# Altium PCB Copy of pwr_V1.1.PcbDoc (part 2 of 2)
Units mil, origin at the board's own origin, x right, y up, seen from the top; angles counter-clockwise.
Board outline 5925.54 x 5925.54 mil, 4 copper layers (Top Layer, GND, VCC, Bottom Layer); 133 components, 126 nets, 409 pads, 2275 vias.
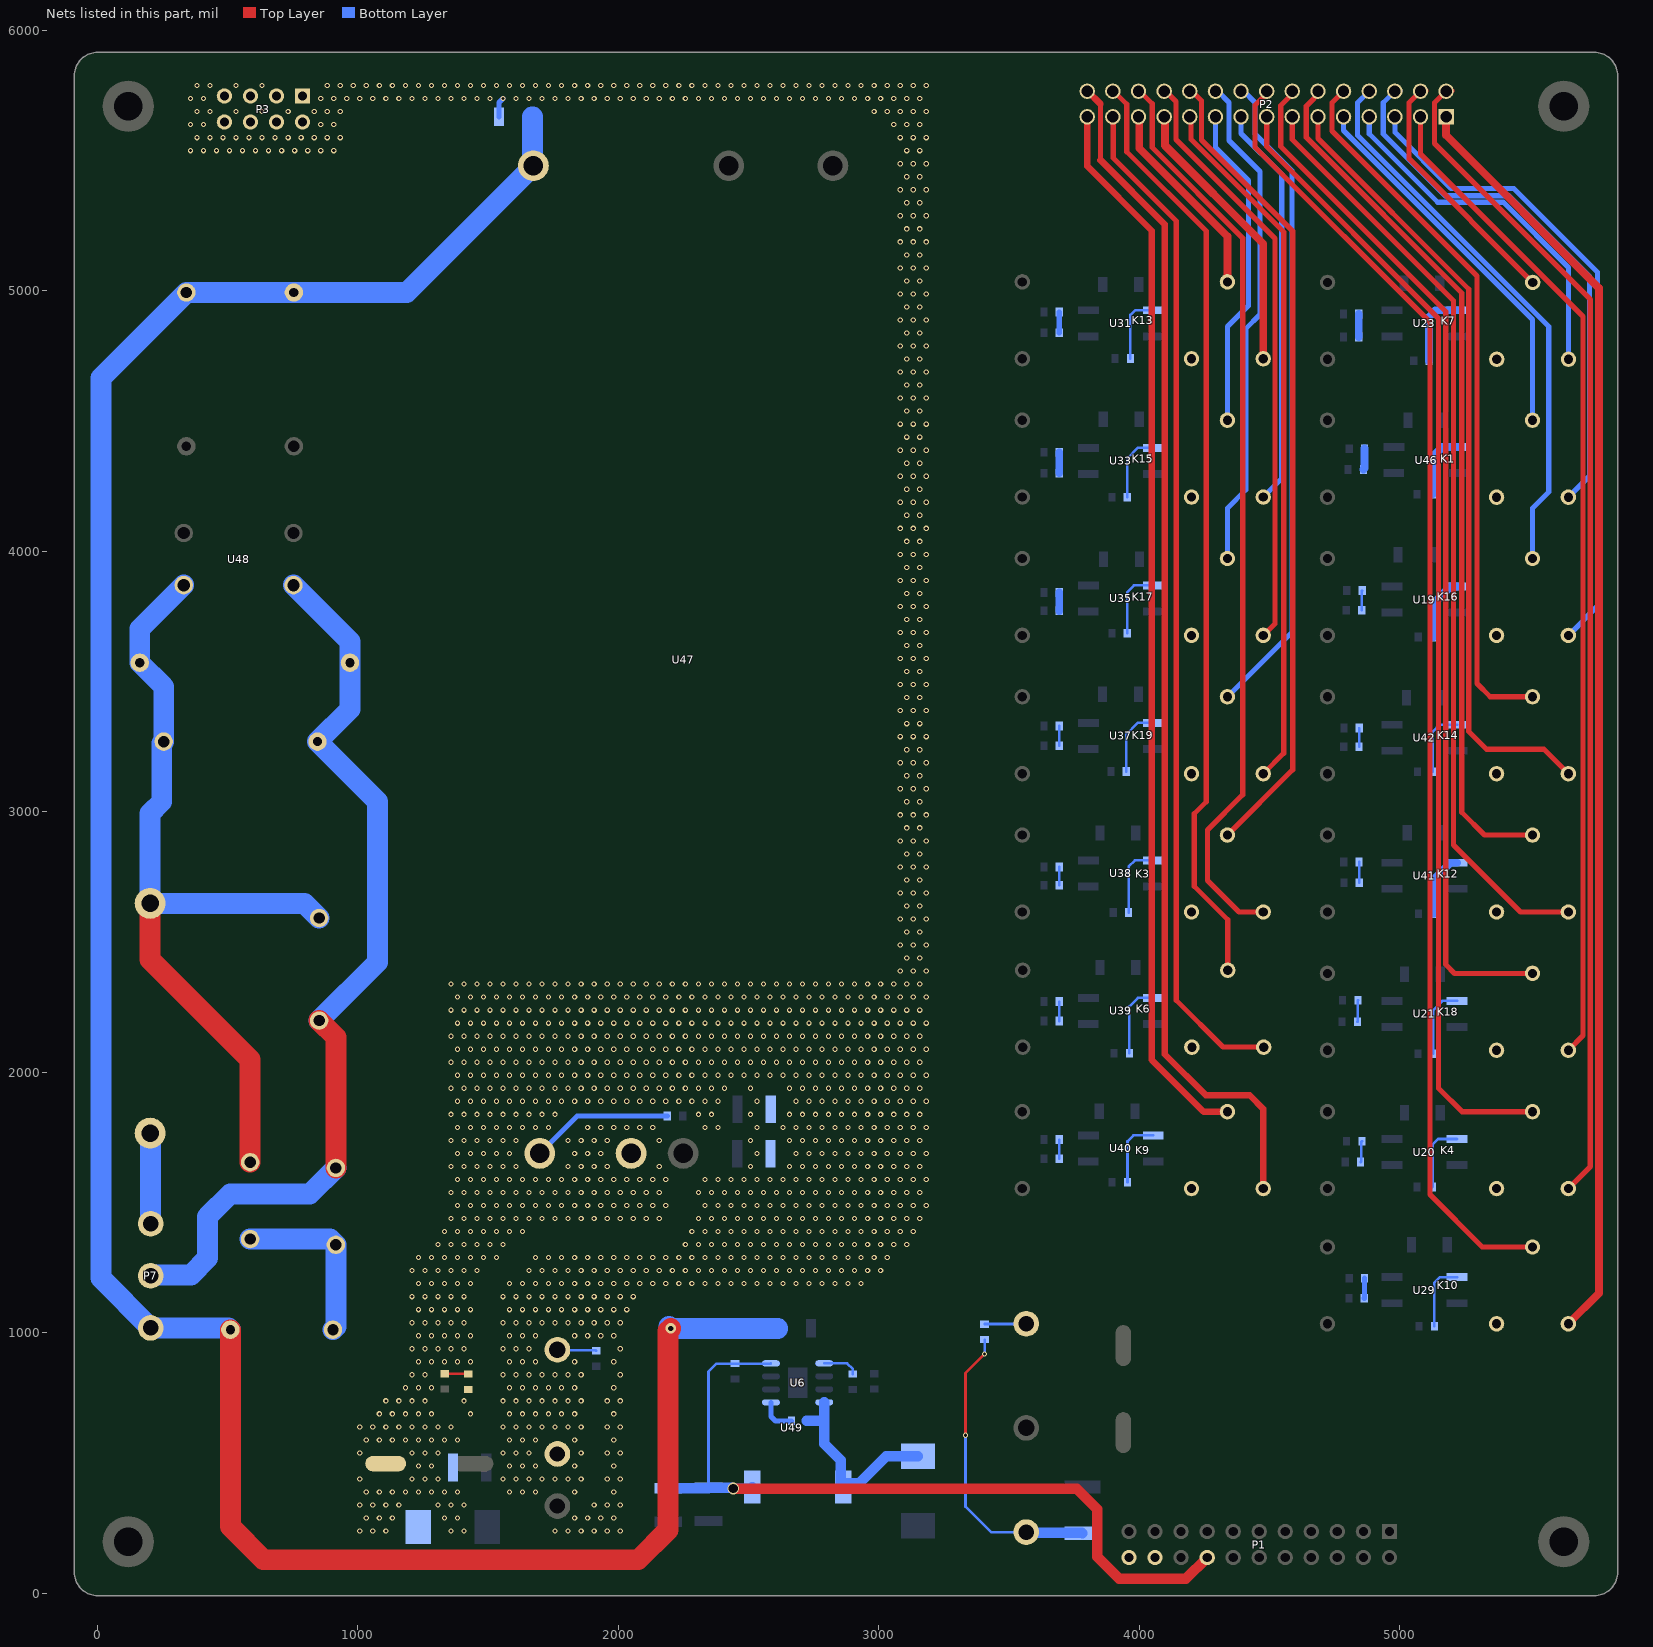
[diagram p2: the nets of this part, all layers, seen from the top]

## Via types
v1: diameter 20, hole 12, Top Layer to Bottom Layer, tented both sides, 2255 vias
v2: diameter 40, hole 20, Top Layer to Bottom Layer, tented both sides, 17 vias
v3: diameter 45, hole 35, Top Layer to Bottom Layer, tented both sides, 1 vias
v4: diameter 45, hole 30, Top Layer to Bottom Layer, tented both sides, 1 vias
v5: diameter 59.06, hole 39.37, Top Layer to Bottom Layer, 1 vias

## Nets (pads, with @x,y where several pads share a name; then routed paths per layer and width w, separated by ;. In a path a pad name is that pad's centre, name@x,y a point inside that pad or via, vN(x,y) a via of type N, cw(c..) or ccw(c..) an arc to the next point about the centre after c; other vN are vias at no path point) (continued)
GND: C44.2 C132.1 C134.1 C135.1 C136.1 D26.1 LED17.2 P1.20 P1.22 P3.1 P3.2 P3.3 P3.4 P3.5 P3.6 P3.7 P3.8 U47.5 U49.2 | length 76.3
  Bottom Layer w20: C132.1@1542.05,5668 1542.05,5722.89 v1(1557.16,5738)
  other v1: 1007.16,238 1057.16,238 1107.16,238 1357.16,238 1407.16,238 1757.16,238 1807.16,238 1857.16,238 1907.16,238 1957.16,238 2007.16,238 1032.16,288 1082.16,288 1132.16,288 1332.16,288 1382.16,288 1832.16,288 1882.16,288 1932.16,288 1982.16,288 1007.16,338 1057.16,338 1107.16,338 1157.16,338 1307.16,338 1357.16,338 1407.16,338 1907.16,338 1957.16,338 2007.16,338 1032.16,388 1082.16,388 1132.16,388 1182.16,388 1232.16,388 1282.16,388 1332.16,388 1382.16,388 1582.16,388 1632.16,388 1682.16,388 1832.16,388 1982.16,388 1007.16,438 1207.16,438 1257.16,438 1307.16,438 1557.16,438 1607.16,438 1657.16,438 1707.16,438 1757.16,438 1807.16,438 1857.16,438 1957.16,438 2007.16,438 1232.16,488 1282.16,488 1582.16,488 1632.16,488 1682.16,488 1832.16,488 1982.16,488 1007.16,538 1207.16,538 1257.16,538 1307.16,538 1557.16,538 1607.16,538 1657.16,538 1857.16,538 1957.16,538 2007.16,538 1032.16,588 1082.16,588 1132.16,588 1182.16,588 1232.16,588 1282.16,588 1332.16,588 1382.16,588 1582.16,588 1632.16,588 1682.16,588 1832.16,588 1982.16,588 1007.16,638 1057.16,638 1107.16,638 1157.16,638 1207.16,638 1257.16,638 1307.16,638 1357.16,638 1557.16,638 1607.16,638 1657.16,638 1707.16,638 1757.16,638 1807.16,638 1857.16,638 1957.16,638 2007.16,638 1082.16,688 1132.16,688 1182.16,688 1232.16,688 1282.16,688 1432.16,688 1582.16,688 1632.16,688 1682.16,688 1732.16,688 1782.16,688 1832.16,688 1982.16,688 1107.16,738 1157.16,738 1207.16,738 1257.16,738 1407.16,738 1557.16,738 1607.16,738 1657.16,738 1707.16,738 1757.16,738 1807.16,738 1857.16,738 1957.16,738 2007.16,738 1182.16,788 1232.16,788 1282.16,788 1582.16,788 1632.16,788 1682.16,788 1732.16,788 1782.16,788 1832.16,788 1982.16,788 1207.16,838 1257.16,838 1557.16,838 1607.16,838 1657.16,838 1707.16,838 1757.16,838 1807.16,838 1857.16,838 2007.16,838 1232.16,888 1282.16,888 1332.16,888 1382.16,888 1432.16,888 1582.16,888 1632.16,888 1682.16,888 1832.16,888 1982.16,888 1207.16,938 1257.16,938 1307.16,938 1357.16,938 1407.16,938 1557.16,938 1607.16,938 1657.16,938 2007.16,938 1232.16,988 1282.16,988 1332.16,988 1382.16,988 1432.16,988 1582.16,988 1632.16,988 1682.16,988 1832.16,988 1882.16,988 1932.16,988 1982.16,988 1207.16,1038 1257.16,1038 1307.16,1038 1357.16,1038 1407.16,1038 1557.16,1038 1607.16,1038 1657.16,1038 1707.16,1038 1757.16,1038 1807.16,1038 1857.16,1038 1907.16,1038 1957.16,1038 2007.16,1038 1232.16,1088 1282.16,1088 1332.16,1088 1382.16,1088 1432.16,1088 1582.16,1088 1632.16,1088 1682.16,1088 1732.16,1088 1782.16,1088 1832.16,1088 1882.16,1088 1932.16,1088 1982.16,1088 2032.16,1088 1207.16,1138 1257.16,1138 1307.16,1138 1357.16,1138 1407.16,1138 1557.16,1138 1607.16,1138 1657.16,1138 1707.16,1138 1757.16,1138 1807.16,1138 1857.16,1138 1907.16,1138 1957.16,1138 2007.16,1138 2057.16,1138 1232.16,1188 1282.16,1188 1332.16,1188 1382.16,1188 1432.16,1188 1582.16,1188 1632.16,1188 1682.16,1188 1732.16,1188 1782.16,1188 1832.16,1188 1882.16,1188 1932.16,1188 1982.16,1188 2032.16,1188 2082.16,1188 2132.16,1188 2182.16,1188 2232.16,1188 2282.16,1188 2332.16,1188 2382.16,1188 2432.16,1188 2482.16,1188 2532.16,1188 2582.16,1188 2632.16,1188 2682.16,1188 2732.16,1188 2782.16,1188 2832.16,1188 2882.16,1188 2932.16,1188 1207.16,1238 1257.16,1238 1307.16,1238 1357.16,1238 1407.16,1238 1457.16,1238 1657.16,1238 1707.16,1238 1757.16,1238 1807.16,1238 1857.16,1238 1907.16,1238 1957.16,1238 2007.16,1238 2057.16,1238 2107.16,1238 2157.16,1238 2207.16,1238 2257.16,1238 2307.16,1238 2357.16,1238 2407.16,1238 2457.16,1238 2507.16,1238 2557.16,1238 2607.16,1238 2657.16,1238 2707.16,1238 2757.16,1238 2807.16,1238 2857.16,1238 2907.16,1238 2957.16,1238 3007.16,1238 1232.16,1288 1282.16,1288 1332.16,1288 1382.16,1288 1432.16,1288 1482.16,1288 1532.16,1288 1682.16,1288 1732.16,1288 1782.16,1288 1832.16,1288 1882.16,1288 1932.16,1288 1982.16,1288 2032.16,1288 2082.16,1288 2132.16,1288 2182.16,1288 2232.16,1288 2282.16,1288 2332.16,1288 2382.16,1288 2432.16,1288 2482.16,1288 2532.16,1288 2582.16,1288 2632.16,1288 2682.16,1288 2732.16,1288 2782.16,1288 2832.16,1288 2882.16,1288 2932.16,1288 2982.16,1288 3032.16,1288 1307.16,1338 1357.16,1338 1407.16,1338 1457.16,1338 1507.16,1338 1557.16,1338 2257.16,1338 2307.16,1338 2357.16,1338 2407.16,1338 2457.16,1338 2507.16,1338 2557.16,1338 2607.16,1338 2657.16,1338 2707.16,1338 2757.16,1338 2807.16,1338 2857.16,1338 2907.16,1338 2957.16,1338 3007.16,1338 3057.16,1338 3107.16,1338 1332.16,1388 1382.16,1388 1432.16,1388 1482.16,1388 1532.16,1388 1582.16,1388 1632.16,1388 2282.16,1388 2332.16,1388 2382.16,1388 2432.16,1388 2482.16,1388 2532.16,1388 2582.16,1388 2632.16,1388 2682.16,1388 2732.16,1388 2782.16,1388 2832.16,1388 2882.16,1388 2932.16,1388 2982.16,1388 3032.16,1388 3082.16,1388 3132.16,1388 1357.16,1438 1407.16,1438 1457.16,1438 1507.16,1438 1557.16,1438 1607.16,1438 1657.16,1438 1707.16,1438 1757.16,1438 1807.16,1438 1857.16,1438 1907.16,1438 1957.16,1438 2007.16,1438 2057.16,1438 2107.16,1438 2157.16,1438 2307.16,1438 2357.16,1438 2407.16,1438 2457.16,1438 2507.16,1438 2557.16,1438 2607.16,1438 2657.16,1438 2707.16,1438 2757.16,1438 2807.16,1438 2857.16,1438 2907.16,1438 2957.16,1438 3007.16,1438 3057.16,1438 3107.16,1438 3157.16,1438 1382.16,1488 1432.16,1488 1482.16,1488 1532.16,1488 1582.16,1488 1632.16,1488 1682.16,1488 1732.16,1488 1782.16,1488 1832.16,1488 1882.16,1488 1932.16,1488 1982.16,1488 2032.16,1488 2082.16,1488 2132.16,1488 2182.16,1488 2332.16,1488 2382.16,1488 2432.16,1488 2482.16,1488 2532.16,1488 2582.16,1488 2632.16,1488 2682.16,1488 2732.16,1488 2782.16,1488 2832.16,1488 2882.16,1488 2932.16,1488 2982.16,1488 3032.16,1488 3082.16,1488 3132.16,1488 3182.16,1488 1357.16,1538 1407.16,1538 1457.16,1538 1507.16,1538 1557.16,1538 1607.16,1538 1657.16,1538 1707.16,1538 1757.16,1538 1807.16,1538 1857.16,1538 1907.16,1538 1957.16,1538 2007.16,1538 2057.16,1538 2107.16,1538 2157.16,1538 2307.16,1538 2357.16,1538 2407.16,1538 2457.16,1538 2507.16,1538 2557.16,1538 2607.16,1538 2657.16,1538 2707.16,1538 2757.16,1538 2807.16,1538 2857.16,1538 2907.16,1538 2957.16,1538 3007.16,1538 3057.16,1538 3107.16,1538 3157.16,1538 1382.16,1588 1432.16,1588 1482.16,1588 1532.16,1588 1582.16,1588 1632.16,1588 1682.16,1588 1732.16,1588 1782.16,1588 1832.16,1588 1882.16,1588 1932.16,1588 1982.16,1588 2032.16,1588 2082.16,1588 2132.16,1588 2182.16,1588 2332.16,1588 2382.16,1588 2432.16,1588 2482.16,1588 2532.16,1588 2582.16,1588 2632.16,1588 2682.16,1588 2732.16,1588 2782.16,1588 2832.16,1588 2882.16,1588 2932.16,1588 2982.16,1588 3032.16,1588 3082.16,1588 3132.16,1588 3182.16,1588 1357.16,1638 1407.16,1638 1457.16,1638 1507.16,1638 1557.16,1638 1607.16,1638 1807.16,1638 1857.16,1638 1907.16,1638 1957.16,1638 2157.16,1638 2507.16,1638 2657.16,1638 2707.16,1638 2757.16,1638 2807.16,1638 2857.16,1638 2907.16,1638 2957.16,1638 3007.16,1638 3057.16,1638 3107.16,1638 3157.16,1638 1382.16,1688 1432.16,1688 1482.16,1688 1532.16,1688 1582.16,1688 1832.16,1688 1882.16,1688 1932.16,1688 2532.16,1688 2682.16,1688 2732.16,1688 2782.16,1688 2832.16,1688 2882.16,1688 2932.16,1688 2982.16,1688 3032.16,1688 3082.16,1688 3132.16,1688 3182.16,1688 1357.16,1738 1407.16,1738 1457.16,1738 1507.16,1738 1557.16,1738 1607.16,1738 1807.16,1738 1857.16,1738 1907.16,1738 1957.16,1738 2157.16,1738 2507.16,1738 2657.16,1738 2707.16,1738 2757.16,1738 2807.16,1738 2857.16,1738 2907.16,1738 2957.16,1738 3007.16,1738 3057.16,1738 3107.16,1738 3157.16,1738 1382.16,1788 1432.16,1788 1482.16,1788 1532.16,1788 1582.16,1788 1632.16,1788 1682.16,1788 1732.16,1788 1882.16,1788 1932.16,1788 1982.16,1788 2032.16,1788 2082.16,1788 2132.16,1788 2332.16,1788 2382.16,1788 2532.16,1788 2632.16,1788 2682.16,1788 2732.16,1788 2782.16,1788 2832.16,1788 2882.16,1788 2932.16,1788 2982.16,1788 3032.16,1788 3082.16,1788 3132.16,1788 3182.16,1788 1357.16,1838 1407.16,1838 1457.16,1838 1507.16,1838 1557.16,1838 1607.16,1838 1657.16,1838 1707.16,1838 1757.16,1838 2307.16,1838 2357.16,1838 2507.16,1838 2657.16,1838 2707.16,1838 2757.16,1838 2807.16,1838 2857.16,1838 2907.16,1838 2957.16,1838 3007.16,1838 3057.16,1838 3107.16,1838 3157.16,1838 1382.16,1888 1432.16,1888 1482.16,1888 1532.16,1888 1582.16,1888 1632.16,1888 1682.16,1888 1732.16,1888 1782.16,1888 1832.16,1888 1882.16,1888 1932.16,1888 1982.16,1888 2032.16,1888 2082.16,1888 2132.16,1888 2182.16,1888 2232.16,1888 2282.16,1888 2332.16,1888 2382.16,1888 2532.16,1888 2682.16,1888 2732.16,1888 2782.16,1888 2832.16,1888 2882.16,1888 2932.16,1888 2982.16,1888 3032.16,1888 3082.16,1888 3132.16,1888 3182.16,1888 1357.16,1938 1407.16,1938 1457.16,1938 1507.16,1938 1557.16,1938 1607.16,1938 1657.16,1938 1707.16,1938 1757.16,1938 1807.16,1938 1857.16,1938 1907.16,1938 1957.16,1938 2007.16,1938 2057.16,1938 2107.16,1938 2157.16,1938 2207.16,1938 2257.16,1938 2307.16,1938 2357.16,1938 2407.16,1938 2507.16,1938 2657.16,1938 2707.16,1938 2757.16,1938 2807.16,1938 2857.16,1938 2907.16,1938 2957.16,1938 3007.16,1938 3057.16,1938 3107.16,1938 3157.16,1938 1382.16,1988 1432.16,1988 1482.16,1988 1532.16,1988 1582.16,1988 1632.16,1988 1682.16,1988 1732.16,1988 1782.16,1988 1832.16,1988 1882.16,1988 1932.16,1988 1982.16,1988 2032.16,1988 2082.16,1988 2132.16,1988 2182.16,1988 2232.16,1988 2282.16,1988 2332.16,1988 2382.16,1988 2432.16,1988 2482.16,1988 2532.16,1988 2582.16,1988 2632.16,1988 2682.16,1988 2732.16,1988 2782.16,1988 2832.16,1988 2882.16,1988 2932.16,1988 2982.16,1988 3032.16,1988 3082.16,1988 3132.16,1988 3182.16,1988 1357.16,2038 1407.16,2038 1457.16,2038 1507.16,2038 1557.16,2038 1607.16,2038 1657.16,2038 1707.16,2038 1757.16,2038 1807.16,2038 1857.16,2038 1907.16,2038 1957.16,2038 2007.16,2038 2057.16,2038 2107.16,2038 2157.16,2038 2207.16,2038 2257.16,2038 2307.16,2038 2357.16,2038 2407.16,2038 2457.16,2038 2507.16,2038 2557.16,2038 2607.16,2038 2657.16,2038 2707.16,2038 2757.16,2038 2807.16,2038 2857.16,2038 2907.16,2038 2957.16,2038 3007.16,2038 3057.16,2038 3107.16,2038 3157.16,2038 1382.16,2088 1432.16,2088 1482.16,2088 1532.16,2088 1582.16,2088 1632.16,2088 1682.16,2088 1732.16,2088 1782.16,2088 1832.16,2088 1882.16,2088 1932.16,2088 1982.16,2088 2032.16,2088 2082.16,2088 2132.16,2088 2182.16,2088 2232.16,2088 2282.16,2088 2332.16,2088 2382.16,2088 2432.16,2088 2482.16,2088 2532.16,2088 2582.16,2088 2632.16,2088 2682.16,2088 2732.16,2088 2782.16,2088 2832.16,2088 2882.16,2088 2932.16,2088 2982.16,2088 3032.16,2088 3082.16,2088 3132.16,2088 3182.16,2088 1357.16,2138 1407.16,2138 1457.16,2138 1507.16,2138 1557.16,2138 1607.16,2138 1657.16,2138 1707.16,2138 1757.16,2138 1807.16,2138 1857.16,2138 1907.16,2138 1957.16,2138 2007.16,2138 2057.16,2138 2107.16,2138 2157.16,2138 2207.16,2138 2257.16,2138 2307.16,2138 2357.16,2138 2407.16,2138 2457.16,2138 2507.16,2138 2557.16,2138 2607.16,2138 2657.16,2138 2707.16,2138 2757.16,2138 2807.16,2138 2857.16,2138 2907.16,2138 2957.16,2138 3007.16,2138 3057.16,2138 3107.16,2138 3157.16,2138 1382.16,2188 1432.16,2188 1482.16,2188 1532.16,2188 1582.16,2188 1632.16,2188 1682.16,2188 1732.16,2188 1782.16,2188 1832.16,2188 1882.16,2188 1932.16,2188 1982.16,2188 2032.16,2188 2082.16,2188 2132.16,2188 2182.16,2188 2232.16,2188 2282.16,2188 2332.16,2188 2382.16,2188 2432.16,2188 2482.16,2188 2532.16,2188 2582.16,2188 2632.16,2188 2682.16,2188 2732.16,2188 2782.16,2188 2832.16,2188 2882.16,2188 2932.16,2188 2982.16,2188 3032.16,2188 3082.16,2188 3132.16,2188 3182.16,2188 1357.16,2238 1407.16,2238 1457.16,2238 1507.16,2238 1557.16,2238 1607.16,2238 1657.16,2238 1707.16,2238 1757.16,2238 1807.16,2238 1857.16,2238 1907.16,2238 1957.16,2238 2007.16,2238 2057.16,2238 2107.16,2238 2157.16,2238 2207.16,2238 2257.16,2238 2307.16,2238 2357.16,2238 2407.16,2238 2457.16,2238 2507.16,2238 2557.16,2238 2607.16,2238 2657.16,2238 2707.16,2238 2757.16,2238 2807.16,2238 2857.16,2238 2907.16,2238 2957.16,2238 3007.16,2238 3057.16,2238 3107.16,2238 3157.16,2238 1382.16,2288 1432.16,2288 1482.16,2288 1532.16,2288 1582.16,2288 1632.16,2288 1682.16,2288 1732.16,2288 1782.16,2288 1832.16,2288 1882.16,2288 1932.16,2288 1982.16,2288 2032.16,2288 2082.16,2288 2132.16,2288 2182.16,2288 2232.16,2288 2282.16,2288 2332.16,2288 2382.16,2288 2432.16,2288 2482.16,2288 2532.16,2288 2582.16,2288 2632.16,2288 2682.16,2288 2732.16,2288 2782.16,2288 2832.16,2288 2882.16,2288 2932.16,2288 2982.16,2288 3032.16,2288 3082.16,2288 3132.16,2288 3182.16,2288 1357.16,2338 1407.16,2338 1457.16,2338 1507.16,2338 1557.16,2338 1607.16,2338 1657.16,2338 1707.16,2338 1757.16,2338 1807.16,2338 1857.16,2338 1907.16,2338 1957.16,2338 2007.16,2338 2057.16,2338 2107.16,2338 2157.16,2338 2207.16,2338 2257.16,2338 2307.16,2338 2357.16,2338 2407.16,2338 2457.16,2338 2507.16,2338 2557.16,2338 2607.16,2338 2657.16,2338 2707.16,2338 2757.16,2338 2807.16,2338 2857.16,2338 2907.16,2338 2957.16,2338 3007.16,2338 3057.16,2338 3107.16,2338 3157.16,2338 3082.16,2388 3132.16,2388 3182.16,2388 3107.16,2438 3157.16,2438 3082.16,2488 3132.16,2488 3182.16,2488 3107.16,2538 3157.16,2538 3082.16,2588 3132.16,2588 3182.16,2588 3107.16,2638 3157.16,2638 3082.16,2688 3132.16,2688 3182.16,2688 3107.16,2738 3157.16,2738 3082.16,2788 3132.16,2788 3182.16,2788 3107.16,2838 3157.16,2838 3082.16,2888 3132.16,2888 3182.16,2888 3107.16,2938 3157.16,2938 3082.16,2988 3132.16,2988 3182.16,2988 3107.16,3038 3157.16,3038 3082.16,3088 3132.16,3088 3182.16,3088 3107.16,3138 3157.16,3138 3082.16,3188 3132.16,3188 3182.16,3188 3107.16,3238 3157.16,3238 3082.16,3288 3132.16,3288 3182.16,3288 3107.16,3338 3157.16,3338 3082.16,3388 3132.16,3388 3182.16,3388 3107.16,3438 3157.16,3438 3082.16,3488 3132.16,3488 3182.16,3488 3107.16,3538 3157.16,3538 3082.16,3588 3132.16,3588 3182.16,3588 3107.16,3638 3157.16,3638 3082.16,3688 3132.16,3688 3182.16,3688 3107.16,3738 3157.16,3738 3082.16,3788 3132.16,3788 3182.16,3788 3107.16,3838 3157.16,3838 3082.16,3888 3132.16,3888 3182.16,3888 3107.16,3938 3157.16,3938 3082.16,3988 3132.16,3988 3182.16,3988 3107.16,4038 3157.16,4038 3082.16,4088 3132.16,4088 3182.16,4088 3107.16,4138 3157.16,4138 3082.16,4188 3132.16,4188 3182.16,4188 3107.16,4238 3157.16,4238 3082.16,4288 3132.16,4288 3182.16,4288 3107.16,4338 3157.16,4338 3082.16,4388 3132.16,4388 3182.16,4388 3107.16,4438 3157.16,4438 3082.16,4488 3132.16,4488 3182.16,4488 3107.16,4538 3157.16,4538 3082.16,4588 3132.16,4588 3182.16,4588 3107.16,4638 3157.16,4638 3082.16,4688 3132.16,4688 3182.16,4688 3107.16,4738 3157.16,4738 3082.16,4788 3132.16,4788 3182.16,4788 3107.16,4838 3157.16,4838 3082.16,4888 3132.16,4888 3182.16,4888 3107.16,4938 3157.16,4938 3082.16,4988 3132.16,4988 3182.16,4988 3107.16,5038 3157.16,5038 3082.16,5088 3132.16,5088 3182.16,5088 3107.16,5138 3157.16,5138 3082.16,5188 3132.16,5188 3182.16,5188 3107.16,5238 3157.16,5238 3082.16,5288 3132.16,5288 3182.16,5288 3107.16,5338 3157.16,5338 3082.16,5388 3132.16,5388 3182.16,5388 3107.16,5438 3157.16,5438 3082.16,5488 3132.16,5488 3182.16,5488 357.16,5538 407.16,5538 457.16,5538 507.16,5538 557.16,5538 607.16,5538 657.16,5538 707.16,5538 757.16,5538 807.16,5538 857.16,5538 907.16,5538 3107.16,5538 3157.16,5538 382.16,5588 432.16,5588 482.16,5588 532.16,5588 582.16,5588 632.16,5588 682.16,5588 732.16,5588 782.16,5588 832.16,5588 882.16,5588 932.16,5588 3082.16,5588 3132.16,5588 3182.16,5588 357.16,5638 407.16,5638 857.16,5638 907.16,5638 3057.16,5638 3107.16,5638 3157.16,5638 382.16,5688 432.16,5688 532.16,5688 632.16,5688 732.16,5688 832.16,5688 882.16,5688 932.16,5688 2982.16,5688 3032.16,5688 3082.16,5688 3132.16,5688 3182.16,5688 357.16,5738 407.16,5738 857.16,5738 907.16,5738 957.16,5738 1007.16,5738 1057.16,5738 1107.16,5738 1157.16,5738 1207.16,5738 1257.16,5738 1307.16,5738 1357.16,5738 1407.16,5738 1457.16,5738 1507.16,5738 1607.16,5738 1657.16,5738 1707.16,5738 1757.16,5738 1807.16,5738 1857.16,5738 1907.16,5738 1957.16,5738 2007.16,5738 2057.16,5738 2107.16,5738 2157.16,5738 2207.16,5738 2257.16,5738 2307.16,5738 2357.16,5738 2407.16,5738 2457.16,5738 2507.16,5738 2557.16,5738 2607.16,5738 2657.16,5738 2707.16,5738 2757.16,5738 2807.16,5738 2857.16,5738 2907.16,5738 2957.16,5738 3007.16,5738 3057.16,5738 3107.16,5738 3157.16,5738 382.16,5788 432.16,5788 532.16,5788 632.16,5788 882.16,5788 932.16,5788 982.16,5788 1032.16,5788 1082.16,5788 1132.16,5788 1182.16,5788 1232.16,5788 1282.16,5788 1332.16,5788 1382.16,5788 1432.16,5788 1482.16,5788 1532.16,5788 1582.16,5788 1632.16,5788 1682.16,5788 1732.16,5788 1782.16,5788 1832.16,5788 1882.16,5788 1932.16,5788 1982.16,5788 2032.16,5788 2082.16,5788 2132.16,5788 2182.16,5788 2232.16,5788 2282.16,5788 2332.16,5788 2382.16,5788 2432.16,5788 2482.16,5788 2532.16,5788 2582.16,5788 2632.16,5788 2682.16,5788 2732.16,5788 2782.16,5788 2832.16,5788 2882.16,5788 2932.16,5788 2982.16,5788 3032.16,5788 3082.16,5788 3132.16,5788 3182.16,5788
NetC62_2: C62.2 C129.1 C131.2 C132.2 P7.3 R177.1 U47.3 | length 9958.1
  Top Layer w80: R177.1@510.26,1011 510.26,255.74 638,128 2076.5,128 2191,242.5 2191,1006 v2(2201,1016)
  Bottom Layer w80: R177.1@510.26,1011 503.26,1018 P7.3@204.26,1018 13,1209.26 13,4665.29 C131.2@341.26,4993.55 C129.1@754,4993.55 1187.28,4993.55 U47.3@1673.85,5480.13 1670,5483.98 C132.2@1670,5668 ; v2@2194,1023 v2(2201,1016) C62.2@2612,1016
NetC87_2: C87.2 R123.1 | length 76.8
  Bottom Layer w10: R123.1@4854,3773 4855,3774 4855,3848 C87.2@4856,3849
NetC88_2: C88.2 R125.1 | length 82.1
  Bottom Layer w10: R125.1@4850,1655 4852.53,1657.53 4852.53,1732.47 C88.2@4855.06,1735
NetC89_2: C89.2 R126.1 | length 83.8
  Bottom Layer w10: R126.1@4838,2193 4839,2194 4839,2275 C89.2@4840,2276
NetC90_2: C90.2 R122.1 | length 81.7
  Bottom Layer w30: R122.1@4861.06,4314 4861.06,4314.51 4865.06,4318.51 C90.2@4865.06,4394
NetC91_2: C91.2 R129.1 | length 88
  Bottom Layer w30: R129.1@4843.06,4823 C91.2@4843.03,4910.97
NetC93_2: C93.2 R133.1 | length 77.4
  Bottom Layer w20: R133.1@4864.06,1131.82 4864.53,1132.29 4864.53,1208.35 C93.2@4865,1208.82
NetC95_2: C95.2 R137.1 | length 80
  Bottom Layer w20: R137.1@3693,4839 C95.2@3693,4919
NetC98_2: C98.2 R141.1 | length 80
  Bottom Layer w30: R141.1@3693,4300 C98.2@3693,4380
NetC102_2: C102.2 R145.1 | length 71
  Bottom Layer w30: R145.1@3693,3771 C102.2@3693,3842
NetC104_2: C104.2 R149.1 | length 76
  Bottom Layer w10: R149.1@3693,3253 C104.2@3693,3329
NetC106_2: C106.2 R151.1 | length 70
  Bottom Layer w10: R151.1@3693,2718 C106.2@3693,2788
NetC107_2: C107.2 R153.1 | length 75
  Bottom Layer w10: R153.1@3693,2196 C107.2@3693,2271
NetC109_2: C109.2 R155.1 | length 73
  Bottom Layer w10: R155.1@3693,1668 C109.2@3693,1741
NetC110_2: C110.2 R157.1 | length 80.4
  Bottom Layer w10: C110.2@4844,2807 4844.5,2806.5 4844.5,2727.5 R157.1@4845,2727
NetC111_2: C111.2 R159.1 | length 72.4
  Bottom Layer w10: R159.1@4844,3249 4844.5,3249.5 4844.5,3320.5 C111.2@4845,3321
NetC130_1: C130.1 P7.2 R174.2 R175.1 R176.1 U48.1 | length 3569.6
  Top Layer w80: R175.1@851,2198 915.26,2133.74 R176.1@915.26,1632.28
  Bottom Layer w80: P7.2@204.26,1218 207.79,1221.53 358.53,1221.53 423,1286 423,1445 510,1532 814.98,1532 R176.1@915.26,1632.28 ; U48.1@752.52,3870 969.35,3653.17 R174.2@969.35,3572 969.35,3393.54 C130.1@844.81,3269 1075,3038.81 1075,2422 R175.1@851,2198
NetC130_2: C130.2 F3.2 R173.2 R174.1 R175.2 U48.2 | length 3176.9
  Top Layer w80: F3.2@202,2647.89 202,2433 586.26,2048.74 R173.2@586.26,1654.28
  Bottom Layer w80: U48.2@331.26,3870 162.26,3701 R174.1@162.26,3572 254.26,3480 C130.2@254.26,3269 247,3261.74 247,3038 202,2993 F3.2@202,2647.89 794.81,2647.89 R175.2@851,2591.7
NetC137_1: C137.1 D4.2 L3.1 U6.8 | length 761.5
  Bottom Layer w40: C137.1@2724,661 2782.18,661 2790.36,652.82 ; U6.8@2790.36,732 2790.36,652.82 ; D4.2@3150,524.75 3027.75,524.75 2924,421 2875.5,421 2864,409.5 L3.1@2864,407 2854,417 2854,510 2790.36,573.64 2790.36,652.82
NetC137_2: C137.2 U6.1 | length 140.1
  Bottom Layer w20: U6.1@2585.64,732 2585.64,678.36 2603,661 C137.2@2664.94,661
NetF3_1: F3.1 P7.1 | length 348.9
  Bottom Layer w80: F3.1@202,1766 203.13,1764.87 203.13,1419.13 P7.1@204.26,1418
NetF4_1: F4.1 R178.2 U49.4 | length 1162.5
  Top Layer w10: v1(3333,606) 3333,845 v1(3406,918)
  Bottom Layer w10: v1(3333,606) 3333,332 3431,234 U49.4@3566,234 ; v1(3406,918) R178.2@3406,973
  Bottom Layer w40: U49.4@3566,234 3568,232 3780,232 F4.1@3782,230
NetLED17_1: LED17.1 R102.1 | length 91.4
  Top Layer w10: R102.1@1333,842.06 1333.5,841.56 1423.5,841.56 LED17.1@1424,841.06
NetR25_2: R25.2 U49.1 | length 150.6
  Bottom Layer w10: U49.1@1766,934 1767.97,932.03 1913.03,932.03 R25.2@1915,930.06
NetR31_1: R31.1 U47.4 | length 549.4
  Bottom Layer w20: U47.4@1698.26,1688 1842.26,1832 R31.1@2188,1832
NetR107_1: R107.1 U46.1 | length 259.7
  Bottom Layer w30: R107.1@5126,4219 5126,4362 5164,4400 U46.1@5227,4400
NetR124_1: R124.1 U19.1 | length 245.4
  Bottom Layer w30: R124.1@5130,3671 5130,3799.43 5195,3864.43 U19.1@5220,3864.43
NetR127_1: R127.1 U20.1 | length 265.8
  Bottom Layer w10: R127.1@5126.06,1559 5126.06,1722.06 5147.29,1743.29 U20.1@5220,1743.29
NetR128_1: R128.1 U21.1 | length 273.3
  Bottom Layer w10: R128.1@5129.06,2071 5129.06,2239.06 5163.57,2273.57 U21.1@5220,2273.57
NetR131_1: R131.1 U23.1 | length 286.4
  Bottom Layer w30: R131.1@5113,4731 5113,4900 5138,4925 U23.1@5220,4925
NetR135_1: R135.1 U29.1 | length 263.7
  Bottom Layer w10: R135.1@5133.06,1024 5133.06,1192.06 5154,1213 U29.1@5220,1213
NetR139_1: R139.1 U31.1 | length 262.4
  Bottom Layer w10: R139.1@3966.06,4740 3966.06,4907.06 3984,4925 U31.1@4054,4925
NetR142_1: R142.1 U33.1 | length 266.5
  Bottom Layer w10: R142.1@3954.06,4207 3954.06,4357.06 3994,4397 U33.1@4054,4397
NetR147_1: R147.1 U35.1 | length 268.8
  Bottom Layer w10: R147.1@3954,3685 3954,3843 3980,3869 U35.1@4054,3869
NetR150_1: R150.1 U37.1 | length 265.2
  Bottom Layer w10: R150.1@3950.06,3154 3950.06,3297.06 3994,3341 U37.1@4054,3341
NetR152_1: R152.1 U38.1 | length 280.9
  Bottom Layer w10: R152.1@3959,2613 3959,2789 3983,2813 U38.1@4054,2813
NetR154_1: R154.1 U39.1 | length 284.6
  Bottom Layer w10: R154.1@3962.06,2073 3962.06,2252.06 3995,2285 U39.1@4054,2285
NetR156_1: R156.1 U40.1 | length 265.5
  Bottom Layer w10: R156.1@3955,1577 3955,1734 3978,1757 U40.1@4054,1757
NetR158_1: R158.1 U41.1 | length 247.4
  Bottom Layer w30: R158.1@5131,2608 5131,2739.86 5195,2803.86 U41.1@5220,2803.86
NetR160_1: R160.1 U42.1 | length 258.8
  Bottom Layer w10: R160.1@5127,3153 5127,3308 5153.14,3334.14 U42.1@5220,3334.14
NetR173_1: R173.1 R176.2 R177.2 | length 668.8
  Bottom Layer w80: R173.1@586.26,1359 893.26,1359 R176.2@915.26,1337 915.26,1022.3 R177.2@903.96,1011
NetR178_1: R178.1 U49.6 | length 160.8
  Bottom Layer w10: R178.1@3406,1032.06 3406.97,1033.03 3565.03,1033.03 U49.6@3566,1034
NetR179_1: R179.1 U6.5 | length 138.2
  Bottom Layer w10: U6.5@2790.36,882 2878.68,882 2900,860.68 R179.1@2900,841
RELAY_A1: K1.1 P2.9 | length 1477.1
  Bottom Layer w20: P2.9@4791.53,5660.98 P2.9@4784.51,5668 4784.51,5615.49 5509.8,4890.2 K1.1@5509.8,4503.05 ; P2.9@4799,5666.74 P2.9@4800.26,5668
RELAY_A2: K4.1 P2.15 | length 4401.2
  Top Layer w20: P2.15@4489.24,5668 4489.24,5553.76 5148.74,4894.26 5148.74,1938.26 5238.72,1848.28 K4.1@5509.8,1848.28
RELAY_A3: K7.1 P2.4 | length 965
  Top Layer w20: P2.4@5079.79,5766.41 5035.26,5721.89 5035.26,5507.41 K7.1@5510.4,5032.28 ; P2.4@5089.23,5756.98 P2.4@5100.26,5768
RELAY_A4: K10.1 P2.16 | length 5016.2
  Top Layer w20: P2.16@4500.26,5768 4469.13,5736.87 4444.71,5712.45 4444.71,5551.29 4453,5543 5116,4880 5116,1530 5317.18,1328.82 K10.1@5509.8,1328.82
RELAY_A5: K13.1 P2.25 | length 773.8
  Top Layer w30: P2.25@4000.26,5668 4000.26,5547.74 4338.4,5209.6 K13.1@4338.4,5034.28
RELAY_A6: K15.1 P2.19 | length 1250.6
  Bottom Layer w20: P2.19@4292.39,5668 4292.39,5549.61 4419,5423 4419,4943 4338.4,4862.4 K15.1@4338.4,4503.28
RELAY_A7: K17.1 P2.20 | length 1915.6
  Bottom Layer w20: P2.20@4300.26,5768 4344.79,5723.47 4344.79,5577.21 4464,5458 4464,4909 4409,4854 4409,4236 4338.4,4165.4 K17.1@4338.4,3972.28
RELAY_A8: K19.1 P2.18 | length 2506.2
  Bottom Layer w20: K19.1@4338.4,3441.28 4586,3688.87 4586,5461 4444.71,5602.29 4444.71,5723.55 P2.18@4400.26,5768
RELAY_A9: K3.1 P2.22 | length 3122.5
  Top Layer w20: P2.22@4200.26,5768 4238.49,5729.77 4238.49,5579.51 4589,5229 4589,3160.87 K3.1@4338.4,2910.28
RELAY_A10: K6.1 P2.28 | length 3596.9
  Top Layer w20: P2.28@3900.26,5768 3952,5716.26 3952,5534 4257,5229 4257,3038 4211,2992 4211,2714 4339.8,2585.2 K6.1@4339.8,2391.28
RELAY_A11: K9.1 P2.29 | length 4096.3
  Top Layer w25: P2.29@3800.26,5668 3800.26,5478.74 4048,5231 4048,2047 4246.72,1848.28 K9.1@4338.4,1848.28
RELAY_A12: K12.1 P2.12 | length 3349.5
  Top Layer w20: P2.12@4700.26,5768 4641.56,5709.3 4641.56,5588.44 5238,4992 5238,2998 5325.82,2910.18 K12.1@5509.8,2910.18
RELAY_A13: K14.1 P2.10 | length 2769.7
  Top Layer w20: P2.10@4784.5,5766.41 4739.98,5721.89 4739.98,5614.02 5297,5057 5297,3492 5347.86,3441.14 K14.1@5509.8,3441.14 ; P2.10@4791.59,5759.33 P2.10@4800.26,5768
RELAY_A14: K16.1 P2.8 | length 2155.8
  Bottom Layer w20: P2.8@4882.94,5766.41 4838.41,5721.89 4838.41,5596.94 5572,4863.36 5572,4227 5509.8,4164.8 K16.1@5509.8,3972.09 ; P2.8@4890.81,5758.55 P2.8@4900.26,5768
RELAY_A15: K18.1 P2.14 | length 3988
  Top Layer w20: P2.14@4600.26,5768 4543.13,5710.87 4543.13,5553.87 5177,4920 5177,2413 5210.77,2379.23 K18.1@5509.8,2379.23
RELAY_B1: K1.3 P2.6 | length 2097.5
  Bottom Layer w20: P2.6@4981.36,5766.41 4936.83,5721.89 4936.83,5602.17 5174,5365 5420,5365 5729,5056 5729,4289.18 K1.3@5647.59,4207.77 ; P2.6@4990.02,5757.76 P2.6@5000.26,5768
RELAY_B2: K4.3 P2.2 | length 4531.4
  Top Layer w20: P2.2@5178.2,5766.41 5133.68,5721.89 5133.68,5565.32 5732,4967 5732,1637.41 K4.3@5647.59,1553 ; P2.2@5188.44,5756.18 P2.2@5200.26,5768
RELAY_B3: K7.3 P2.7 | length 1395.6
  Bottom Layer w20: P2.7@4882.94,5668 4882.94,5603.06 5146,5340 5398,5340 5648.2,5089.8 K7.3@5648.2,4737
RELAY_B4: K10.3 P2.1 | length 4926.1
  Top Layer w30: P2.1@5178.21,5668 5178.21,5597.22 5765,5010.43 5765,1150.96 K10.3@5647.59,1033.55
RELAY_B5: K13.3 P2.23 | length 1085.8
  Top Layer w30: P2.23@4100.26,5668 4099,5666.74 4099,5558 4476.2,5180.8 K13.3@4476.2,4739
RELAY_B6: K15.3 P2.17 | length 1554
  Bottom Layer w20: P2.17@4390.81,5668 4390.81,5604.19 4547,5448 4547,4278.8 K15.3@4476.2,4208
RELAY_B7: K17.3 P2.24 | length 2283.6
  Top Layer w20: P2.24@4100.26,5768 4141,5727.26 4141,5581 4520.72,5201.28 4520.72,3721.53 K17.3@4476.2,3677
RELAY_B8: K19.3 P2.21 | length 2702.6
  Top Layer w20: P2.21@4200.26,5668 4199,5666.74 4199,5582 4555,5226 4555,3224.8 K19.3@4476.2,3146
RELAY_B9: K3.3 P2.26 | length 3516.6
  Top Layer w20: P2.26@4000.26,5768 4050,5718.26 4050,5550 4397,5203 4397,3065 4262,2930 4262,2736 4383,2615 K3.3@4476.2,2615
RELAY_B10: K6.3 P2.27 | length 3902.3
  Top Layer w20: P2.27@3900.26,5668 3900.26,5509.74 4142,5268 4142,2276 4322,2096 K6.3@4477.59,2096
RELAY_B11: K9.3 P2.30 | length 4593.4
  Top Layer w20: 3851,5502 3851,5717.26
  Top Layer w25: P2.30@3800.26,5768 3851,5717.26 ; 3851,5502 4098,5255 4098,2069 4256,1911 4424,1911 4476.2,1858.8 K9.3@4476.2,1553
RELAY_B12: K12.3 P2.13 | length 3599.6
  Top Layer w20: P2.13@4587.66,5668 4587.66,5581.34 5207,4962 5207,2872 5464.09,2614.91 K12.3@5647.59,2614.91
RELAY_B13: K14.3 P2.11 | length 3049.5
  Top Layer w20: P2.11@4686.09,5668 4686.09,5584.91 5265,5006 5265,3308 5333,3240 5553.45,3240 K14.3@5647.59,3145.86
RELAY_B14: K16.3 P2.5 | length 2501.4
  Bottom Layer w20: P2.5@4981.36,5668 4981.53,5667.83 4981.53,5608.47 5197,5393 5438,5393 5760,5071 5760,3789.23 K16.3@5647.59,3676.82
RELAY_B15: K18.3 P2.3 | length 3866
  Top Layer w20: P2.3@5079.79,5668 5079.79,5525.86 5704,4901.65 5704,2140.36 K18.3@5647.59,2083.95
RELAY_C1: K1.2
RELAY_C2: K4.2
RELAY_C3: K7.2
RELAY_C4: K10.2
RELAY_C5: K13.2
RELAY_C6: K15.2
RELAY_C7: K17.2
RELAY_C8: K19.2
RELAY_C9: K3.2
RELAY_C10: K6.2
RELAY_C11: K9.2
RELAY_C12: K12.2
RELAY_C13: K14.2
RELAY_C14: K16.2
RELAY_C15: K18.2
VCC_5V_ISO: C67.1 C68.1 C162.1 L3.2 P1.16 U6.4 | length 3128.5
  Top Layer w40: v3(2441,401) 3760,401 3839,322 3839,139 3923,55 4179.41,55 P1.16@4260.63,136.22
  Bottom Layer w10: C162.1@2346,404.95 2346,850 2377.06,881.06 C68.1@2448,881.06 2584.69,881.06 U6.4@2585.64,882
  Bottom Layer w40: C67.1@2191,401.95 C162.1@2346,401.95 ; C162.1@2346,404.95 2346.31,404.64 2436.01,404.64 2439.65,401 v3(2441,401) 2507.61,401 L3.2@2513.61,407
pads on no net: T1.1 T2.1 T3.1 T4.1 U6.2 U6.3

## Polygon pours and split planes (outlines as drawn)
GND on Bottom Layer "GND_L04_P006" (solid, remove dead copper, pour order 6): 4258,-255 4185,-182 4185,187 4198,200 3823,200 3752,129 1329,129 1371,87 1371,-325 4176,-325 4259,-242
GND on Bottom Layer "GND_L04_P005" (solid, remove dead copper, pour order 5): 264,6072 3048,6072 3194,5926 3194,1391 2952,1149 2129,1149 2026,1046 2026,-145 2015,-156 1963,-104 1055,-104 995,-44 995,644 1173,822 1173,1249 1329,1405 1329,2395 3048,2395 3048,5593 2937,5704 953,5704 953,5503 332,5503 332,6019 272,6079
FGND on Bottom Layer "FGND_L04_P002" (solid, remove dead copper, pour order 2): 2187,1072 3179,1072 3318,1211 3318,5238 3332,5252 3891,5252 3927.66,5215.34 3927.66,1576.34 4144,1360 4561,1360 4656,1455 4656,5105 5038,5105 5089,5054 5089,-18 5047,-60 2195,-60 2195,1049 2181,1063
GND on Top Layer "GND_L01_P004" (solid, remove dead copper, pour order 4): 264,6072 3048,6072 3194,5926 3194,1391 2952,1149 2129,1149 2026,1046 2026,-145 2015,-156 1963,-104 1055,-104 995,-44 995,644 1173,822 1173,1249 1329,1405 1329,2395 3048,2395 3048,5593 2937,5704 953,5704 953,5503 332,5503 332,6019 272,6079
FGND on Top Layer "FGND_L01_P003" (solid, remove dead copper, pour order 3): 2187,1072 3179,1072 3318,1211 3318,5238 3332,5252 3891,5252 3927.66,5215.34 3927.66,1576.34 4144,1360 4561,1360 4656,1455 4656,5105 4755,5105 5047,4813 5047,-60 2195,-60 2195,1049 2181,1063

## Keep-outs
Keep-Out Layer:
  lines w5: -100.48,-679.02 ccw(c-21.74,-679.02) -21.74,-757.76 ; 18540.52,-744.74 ccw(c18540.52,-666) 18619.26,-666 ; 18541.26,6133 cw(c18541.26,6054.26) 18620,6054.26
  lines w20: -58.74,91.74 ccw(c20,91.74) 20,13 ; -57.74,75.74 -57.27,5820.24 cw(c9,5820.24) 9,5886.51 5729,5886.51 ; 8,13 5730.26,15.26 ccw(c5730.26,94) 5809,94 ; 5729,5886 cw(c5729,5807.26) 5807.74,5807.26 ; 5807.77,5820.77 5809,85

## Other copper
Bottom Layer:
  rectangle net FGND: 2640.36,723.7 2736.73,882

## Silkscreen, mask and mechanical layers (free items; w line width, h text height)
Top Overlay:
  text "485_B" at 16295.26,6097 h60 r270
  text "485_A" at 16735.26,6084 h60 r270
  text "24V" at 18665.26,5638 h60
  text "24V" at 18935.26,5632 h60
  text "DI4" at 18659.26,5548 h60
  text "G" at 18935.26,5542 h60
  text "DI5" at 18663.26,5451 h60
  text "G" at 18935.26,5446 h60
  text "DI6" at 18660.26,5344 h60
  text "G" at 18935.26,5344 h60
  text "DI" at 19133.26,5246 h60
  text "DI7" at 18675.26,5245 h60
  text "G" at 18935.26,5239 h60
  text "DI0" at 18680.26,5152 h60
  text "G" at 18935.26,5142 h60
  text "DI1" at 18676.26,5049 h60
  text "G" at 18935.26,5044 h60
  text "DI2" at 18676.26,4955 h60
  text "G" at 18935.26,4945 h60
  text "DI3" at 18675.26,4867 h60
  text "G" at 18935.26,4860 h60
  text "G" at 18693.26,4735 h60
  text "G" at 18931.26,4734 h60
  text "PB8" at 18699.26,4630 h60
  text "PB1" at 18935.26,4627 h60
  text "PB1" at 18935.26,4521 h60
  text "PB8" at 18699.26,4519 h60
  text "G" at 18697.26,4432 h60
  text "G" at 18947.26,4429 h60
  text "PB9" at 18699.26,4342 h60
  text "PB2" at 18935.26,4340 h60
  text "PB2" at 18935.26,4244 h60
  text "PB9" at 18699.26,4241 h60
  text "G" at 18928.26,4154 h60
  text "G" at 18696.26,4150 h60
  text "PB10" at 18935.26,4046 h60
  text "PB3" at 18699.26,4039 h60
  text "PB10" at 18934.26,3946 h60
  text "PB3" at 18699.26,3925 h60
  text "G" at 18922.26,3852 h60
  text "G" at 18700.26,3847 h60
  text "PB4" at 18935.26,3741 h60
  text "PB11" at 18699.26,3736 h60
  text "SWDIO" at 14589.26,3635 h60 r270
  text "SWCLK" at 14378.26,3634 h60 r270
  text "PB11" at 18699.26,3625 h60
  text "PB4" at 18935.26,3620 h60
  text "3.3V" at 14699.26,3598 h60 r270
  text "GND" at 14481.26,3559 h60 r270
  text "G" at 18697.26,3530 h60
  text "G" at 18930.26,3530 h60
  text "water out T" at 19248.26,3476 h60 r270
  text "PB5" at 18935.26,3439 h60
  text "PB12" at 18699.26,3432 h60
  text "PB12" at 18699.26,3332 h60
  text "PB5" at 18935.26,3327 h60
  text "G" at 18941.26,3225 h60
  text "G" at 18696.26,3224 h60
  text "PB13" at 18699.26,3109 h60
  text "PB6" at 18935.26,3105 h60
  text "PB13" at 18699.26,3015 h60
  text "PB6" at 18935.26,3006 h60
  text "AI0" at 18699.26,2869 h60
  text "24V" at 18935.26,2858 h60
  text "AI1" at 18699.26,2769 h60
  text "24V" at 18935.26,2759 h60
  text "AI2" at 18699.26,2667 h60
  text "24V" at 18935.26,2659 h60
  text "24V" at 18935.26,2560 h60
  text "AI3" at 18699.26,2559 h60
  text "AI4" at 18699.26,2469 h60
  text "24V" at 18935.26,2459 h60
  text "AI5" at 18699.26,2366 h60
  text "24V" at 18935.26,2362 h60
  text "AI6" at 18699.26,2268 h60
  text "24V" at 18935.26,2255 h60
  text "AI7" at 18699.26,2162 h60
  text "24V" at 18935.26,2160 h60
  text "AI8" at 18699.26,2064 h60
  text "24V" at 18935.26,2059 h60
  text "G" at 18935.26,1962 h60
  text "G" at 18703.26,1958 h60
  text "G" at 18935.26,1870 h60
  text "AO" at 18699.26,1864 h60
  text "G" at 18935.26,1764 h60
  text "24V" at 18699.26,1760 h60
  text "R20" at 18694.26,1587 h60
  text "R19" at 18694.26,1510 h60
  text "R18" at 18694.26,1410 h60
  text "R17" at 18694.26,1306 h60
  text "R16" at 18694.26,1212 h60
  text "R15" at 18694.26,1111 h60
  text "R14" at 18694.26,1011 h60
  text "R13" at 18694.26,913 h60
  text "R12" at 18694.26,814 h60
  text "AC_L" at 329,728 h60
  text "R11" at 18694.26,713 h60
  text "AC_N" at 326,632 h60
  text "IO V1.0" at 4956,621 h60
  text "R10" at 18694.26,609 h60
  text "EARTH" at 330,533 h60
  text "R9" at 18694.26,509 h60
  text "R8" at 18694.26,412 h60
  text "R7" at 18694.26,313 h60
  text "R6" at 18694.26,210 h60
  text "R5" at 18694.26,111 h60
  text "R4" at 18694.26,11 h60
  text "R3" at 18694.26,-89 h60
  text "R2" at 18694.26,-188 h60
  text "R1" at 18694.26,-287 h60
Bottom Overlay:
  text "LCD_RX" at 12932.2,5912 h60 r90
  text "5V" at 12797.26,5909 h60 r90
  text "LCD_TX" at 13029.26,5908 h60 r90
  text "GND" at 13269.26,5905 h60 r90
  text "24V" at 18611.14,5665 h60
  text "24V" at 18269.26,5664 h60
  text "DI4" at 18263.26,5574 h60
  text "G" at 18547.26,5568 h60
  text "DI5" at 18267.26,5477 h60
  text "G" at 18551.26,5472 h60
  text "DI6" at 18264.26,5370 h60
  text "G" at 18557.26,5370 h60
  text "DI7" at 18279.26,5271 h60
  text "G" at 18558.26,5265 h60
  text "DI0" at 18284.26,5178 h60
  text "G" at 18558.26,5168 h60
  text "DI1" at 18280.26,5075 h60
  text "G" at 18559.26,5070 h60
  text "DI2" at 18280.26,4981 h60
  text "G" at 18561.26,4971 h60
  text "DI3" at 18279.26,4893 h60
  text "G" at 18564.26,4867 h60
  text "PB8" at 18324.26,4639 h60
  text "PB1" at 18610.14,4618 h60
  text "PB1" at 18610.14,4522 h60
  text "PB8" at 18325.26,4516 h60
  text "PB9" at 18317.26,4322 h60
  text "PB2" at 18610.14,4316 h60
  text "PB9" at 18319.26,4234 h60
  text "PB2" at 18610.14,4220 h60
  text "PB10" at 18559.26,4055 h60 r90
  text "PB3" at 18323.26,4012 h60
  text "PB3" at 18326.26,3920 h60
  text "PB11" at 18319.26,3722 h60
  text "PB4" at 18610.14,3717 h60
  text "PB4" at 18610.14,3615 h60
  text "PB11" at 18322.26,3603 h60
  text "PB12" at 18323.26,3427 h60
  text "PB5" at 18610.14,3418 h60
  text "PB5" at 18610.14,3320 h60
  text "PB12" at 18327.26,3299 h60
  text "PB13" at 18318.26,3119 h60
  text "PB6" at 18610.14,3115 h60
  text "PB13" at 18318.26,3025 h60
  text "PB6" at 18610.14,3016 h60
  text "AI0" at 18302.26,2879 h60
  text "24V" at 18610.77,2868 h60
  text "AI1" at 18301.26,2779 h60
  text "24V" at 18610.77,2769 h60
  text "AI2" at 18303.26,2677 h60
  text "24V" at 18610.77,2669 h60
  text "24V" at 18610.77,2570 h60
  text "AI3" at 18303.26,2569 h60
  text "AI4" at 18299.26,2479 h60
  text "24V" at 18610.77,2469 h60
  text "AI5" at 18296.26,2376 h60
  text "24V" at 18610.77,2372 h60
  text "AI6" at 18297.26,2278 h60
  text "24V" at 18610.77,2265 h60
  text "AI7" at 18299.26,2172 h60
  text "24V" at 18610.77,2170 h60
  text "AI8" at 18325.26,2074 h60
  text "24V" at 18610.77,2069 h60
  text "G" at 18552.26,1972 h60
  text "G" at 18551.26,1880 h60
  text "AO" at 18318.26,1874 h60
  text "G" at 18559.26,1774 h60
  text "24V" at 18317.26,1770 h60
  text "R20" at 18323.26,1586 h60
  text "R19" at 18610.77,1477 h60
  text "R18" at 18610.77,1377 h60
  text "R17" at 18610.77,1273 h60
  text "R16" at 18601.26,1179 h60
  text "R15" at 18610.77,1078 h60
  text "R14" at 18610.77,978 h60
  text "R13" at 18610.77,880 h60
  text "R12" at 18601.26,781 h60
  text "R11" at 18591.26,680 h60
  text "R10" at 18610.77,576 h60
  text "R9" at 18575.26,476 h60
  text "R8" at 18579.26,379 h60
  text "R7" at 18579.26,280 h60
  text "R6" at 18582.26,177 h60
  text "R5" at 18576.26,78 h60
  text "R4" at 18574.26,-22 h60
  text "R3" at 18575.26,-122 h60
  text "R2" at 18576.26,-221 h60
  text "R1" at 18568.26,-320 h60
Mechanical 1:
  lines w5: 10994.52,-763.76 ccw(c10994.52,-685.02) 11073.26,-685.02 ; 17880.26,1337 cw(c17897.94,1351.5) 17883.44,1369.18 ; 17889.67,1327.76 ccw(c17907.34,1342.26) 17921.84,1324.58 ; 18498.26,1666 cw(c18499.76,1644.5) 18521.26,1646 ; 18521.26,1565 ccw(c18542.76,1566.5) 18544.26,1545 ; 18546.52,6139 cw(c18546.52,6060.26) 18625.26,6060.26 ; 18549.26,1545 ccw(c18547.76,1566.5) 18569.26,1568
  lines w20: -78.74,78.74 ccw(c0,78.74) 0,0 5748.03,0 ccw(c5748.03,78.74) 5826.77,78.74 5826.77,5826.77 ccw(c5748.03,5826.77) 5748.03,5905.51 0,5905.51 ccw(c0,5826.77) -78.74,5826.77 -78.74,78.74 ; 1029,860 1116,860 1116,2249 1029,2249 1029,860 ; 2026,5329 2026,5666 2141,5666 2929,5666 3017,5578 3017,5181 2935,5181 2935,5511 2857,5589 2147,5589 2147,5329 2026,5329

## Dimensions
-107.84,-685.02 to 11073.26,-685.02 on Keep-Out Layer
-38.08,-763.76 to -29.84,6126 on Keep-Out Layer

## Text inside footprints (layer, text, board x,y; h text height)
P1: Top Overlay "22" at 3900.63,156.22 h60 r180; Top Overlay "21" at 3900.63,256.22 h60 r180; Top Overlay "2" at 5060.63,156.22 h60 r180; Top Overlay "1" at 5060.63,256.22 h60 r180
P3: Top Overlay "2" at 887.4,5668.03 h60 r180; Top Overlay "1" at 867.4,5768.03 h60 r180; Top Overlay "7" at 427.4,5768.03 h60 r180; Top Overlay "8" at 427.4,5668.03 h60 r180